# Altium PCB V2模块位置结构框图(AD6).PCBDOC
Units mil, origin at the board's own origin, x right, y up, seen from the top; angles counter-clockwise.
Board outline 6000 x 4000 mil, 2 copper layers (Top Layer, Bottom Layer); 6 components, 42 nets, 25 pads, 4 vias.
Unrouted connection lines stored in the file: 5.
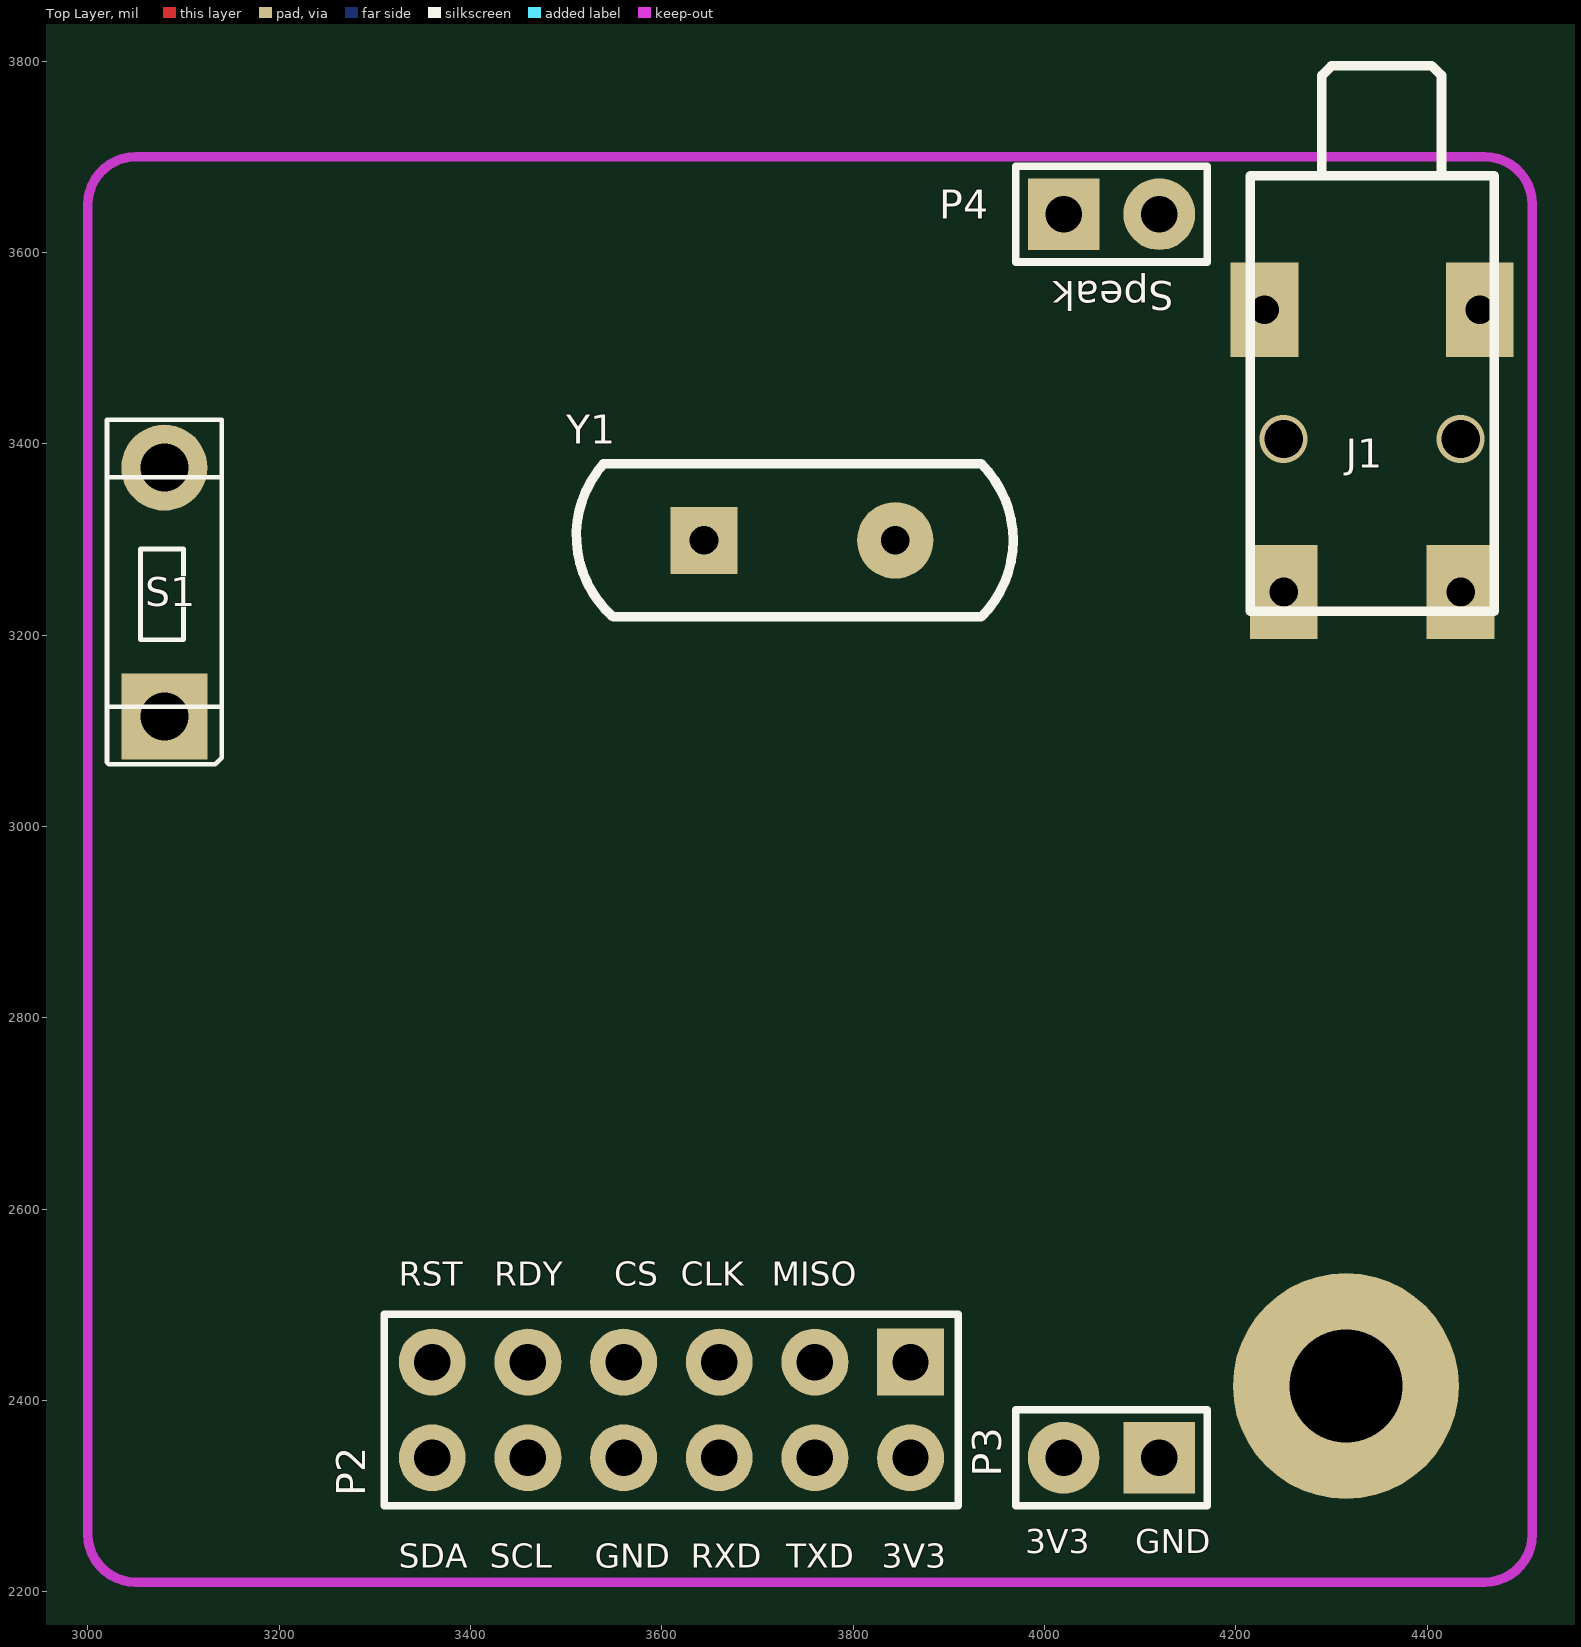
[diagram p0: Top Layer view]
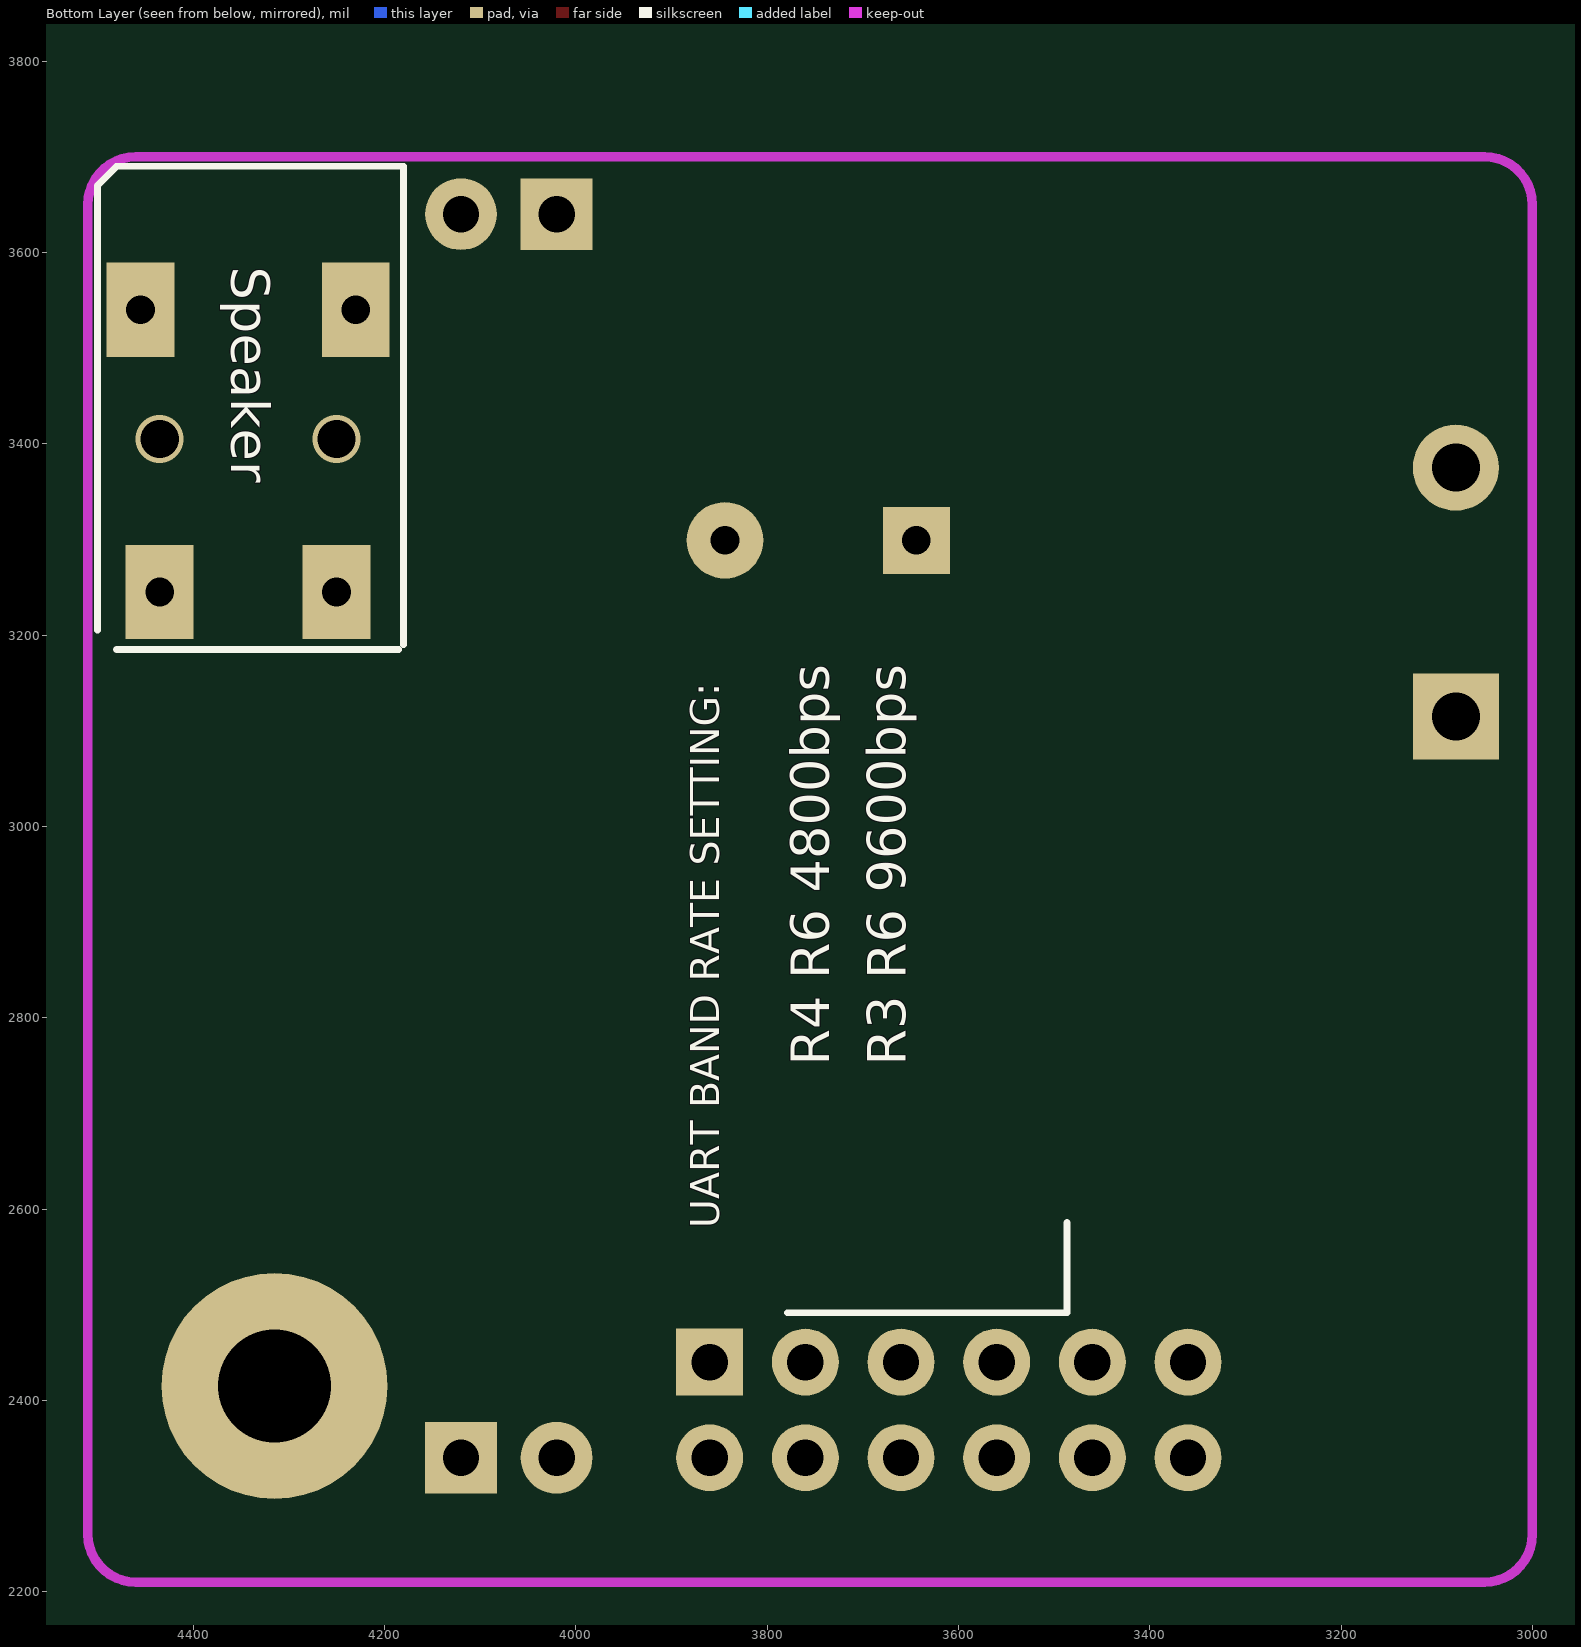
[diagram p1: Bottom Layer view, seen from below]

## Layer stack, top to bottom
Top Layer: signal copper 1.4
Dielectric: dielectric 12.6, FR-4, Dk 4.8
Bottom Layer: signal copper 1.4

## Board outline
1000,1000 7000,1000 7000,5000 1000,5000

## Design rules (kind name [scope] priority, off if disabled: settings)
Clearance [All] p1: gap=7
ComponentClearance [All] p1: gap=10 collisioncheckmode=0
HoleSize [All] p1: absolutevalues=TRUE maxlimit=10000 minlimit=1 maxpercent=80.000 minpercent=20.000
PolygonConnect [All] p1: connectstyle=Relief reliefconductorwidth=10 reliefentries=4 polygonreliefangle="90 Angle"
RoutingVias [All] p1: holewidth=15 width=25 viastyle="Through Hole" minholewidth=15 minwidth=25 maxholewidth=25 maxwidth=50
SolderMaskExpansion [All] p1: expansion=4
TestPointUsage [All] p1: valid=0 allowmultiple=FALSE
Testpoint [All] p1: side=15 testpointundercomponent=TRUE minsize=40 maxsize=100 preferedsize=60 minholesize=0 maxholesize=40 preferedholesize=32 testpointgrid=1 style=1023 order=-539222988
Width [All] p1: maxlimit=20 minlimit=7 preferedwidth=7
16 further rules are at their usual default settings.

## Components (designator, comment, footprint, x,y, rotation, side; value= is the part's Value field where it differs from the comment)
J1 "PJ-325C" PJ-321 4340,3440 r270 top
P2 "Header 6X2A" HDR2X6_CEN 3860,2440 r180 top
P3 "Header 2" HDR1X2 4120,2340 r180 top
P4 "Header 2" HDR1X2 4020,3640 r0 top
S1 "KEY_" KEY2 3080,3240 r90 top
Y1 "XTAL_1" XTAL 3744,3299 r0 top

## Footprints (in the part's own frame and the unit in brackets; to place one, negate y for a bottom-side part, rotate by r counter-clockwise, add the part's x,y. Pads: shape width x height; smd on the part's side, far side on the other; paste and mask are expansions set on the pad)
HDR1X2 [mil] "Connector; Header; 2 Position"
  rect 75x75 hole 38: 1(0,0)
  round 75 hole 38: 2(100,0)
  silkscreen extent -50,-50 150,50
HDR2X6_CEN [mil] "Connector; Header; 6x2 Position"
  rect 70x70 hole 38: 1(0,0)
  round 70 hole 38: 2(100,0) 3(200,0) 4(300,0) 5(400,0) 6(500,0) 7(0,100) 8(100,100) 9(200,100) 10(300,100) 11(400,100) 12(500,100)
  silkscreen extent -50,-50 550,150
KEY2 [mil]
  rect 90x90 hole 50: 1(-125,0)
  round 90 hole 50: 2(135,0)
  silkscreen extent -175,-60 185,60
PJ-321 [mil]
  rect 98.43x70.87 hole 30: 2(195,-90) 3(195,95) 4(-100,115) 4(-100,-110)
  silkscreen extent -355,-125 215,130
XTAL [mil]
  rect 70x70 hole 30: 1(-100,0)
  round 80 hole 30: 2(100,0)
  silkscreen extent -233,-80 223,80

## Part data
J1: "Jack Socket, 1/4\" [6.5mm], Thru-Hole, Vertical, 3-Conductor with Tip closed & Ring open"
P2: "Header, 6-Pin, Dual row"
P3 P4: "Header, 2-Pin"
S1: "Switch"
Y1: library part XTAL1, "晶振"

## Free pads (board coordinates)
  round 236.22 hole 118.11: 0(4315,2415)

## Via types
v1: diameter 0, hole 39.37, Top Layer to Bottom Layer, 2 vias
v2: diameter 50, hole 40, Top Layer to Bottom Layer, 2 vias

## Nets (pads, with @x,y where several pads share a name; then routed paths per layer and width w, separated by ;. In a path a pad name is that pad's centre, name@x,y a point inside that pad or via, vN(x,y) a via of type N, cw(c..) or ccw(c..) an arc to the next point about the centre after c; other vN are vias at no path point)
12MI: Y1.2
12MO: Y1.1
A3: 
A4: 
ADAC0: J1.2
ADAC1: J1.4
AVDD12: 
AVDD33: 
BAUD1: 
BAUD2: 
D0: 
D1: 
D2: 
D3: 
GND: P2.10 P3.1 S1.1
IIC_SCL: P2.11
IIC_SDA: P2.12
MIC_BIAS: 
MIC_N: 
MIC_P: 
NetC14_2: 
NetC16_2: 
NetC17_2: 
NetC21_1: 
NetDx1_1: 
NetR7_2: 
NetR8_2: 
NetU1_53: 
PWR_IN: P2.7 P3.2
RDY: P2.5
RESET: P2.6 S1.2
RXD: P2.9
SPI_CLK: P2.3
SPI_CS: P2.4
SPI_MISO: P2.2
SPI_MOSI: P2.1
SPKL: P4.2
SPKN: P4.1
TXD: P2.8
VDD12: 
VDD33: 
VREF: 
pads on no net: J1.3
copper on no net:
  other v1: 4250,3405 4435,3405
  other v2: 4250,3405 4435,3405

## Keep-outs
Keep-Out Layer:
  circle w10: c3220,2210 r0
  lines w10: 3210,2210 4460,2210 ccw(c4460,2260) 4510,2260 4510,3650 ccw(c4460,3650) 4460,3700 3050,3700 ccw(c3050,3650) 3000,3650 3000,2260 ccw(c3050,2260) 3050,2210 3220,2210

## Silkscreen, mask and mechanical layers (free items; w line width, h text height)
Top Overlay:
  text "Speak" at 4135,3570 h30 r180
  text "RST" at 3325,2520 h25
  text "RDY" at 3425,2520 h25
  text "CS" at 3550,2520 h25
  text "CLK" at 3620,2520 h25
  text "MISO" at 3715,2520 h25
  text "3V3" at 3980,2240 h25
  text "GND" at 4095,2240 h25
  text "SDA" at 3325,2225 h25
  text "SCL" at 3420,2225 h25
  text "GND" at 3530,2225 h25
  text "RXD" at 3630,2225 h25
  text "TXD" at 3730,2225 h25
  text "3V3" at 3830,2225 h25
Bottom Overlay:
  lines w7: 3486.43,2585.96 3486.43,2491.43 3778.57,2491.43 ; 4180,3190 4180,3690 4330,3690 4470,3690 ; 4185,3185 4480,3185 ; 4465,3690 4480,3690 4500,3670 4500,3660 4500,3205
  text "Speaker" at 4360,3585 h40 r90
  text "R3 R6 9600bps" at 3655,2750 h40 r270
  text "R4 R6 4800bps" at 3735,2750 h40 r270
  text "UART BAND RATE SETTING:" at 3850,2580 h30 r270